# EAGLE board CC_SegmentoE,B (EAGLE 9.7.0)

Size 418.47 x 126.43 mm. Coordinates in mm from the lower left corner, seen from the top.
Outline: 0,0 418.47,0 418.47,126.43 0,126.43 0,0
Copper layers (1*16): Top 0.035mm / dielectric 1.5mm / Bottom 0.035mm
Design rules "default": minimum track width 6mil, minimum drill 0.35mm, track to track 6mil, track to pad 6mil, pad to pad 6mil, via to via 6mil, smd to smd 6mil, copper to edge 40mil, drill to drill 6mil, minimum pad ring 10mil, minimum via ring 8mil, stop-mask expansion 4mil, vias tented up to drill 0mil, thermal gap 10mil

## Footprints (pad centres in the part's own frame; a part is rotated, then mirrored left to right if it is on the bottom)
BATTERY-GENERIC = drill 1.118 pad 3.15 octagon: + 2.54,0; - -2.54,0
LEDRD254W60D565H860B = drill 0.981 pad 1.581: 1 -1.27,0; 2 1.27,0
RESAD1016W63L850D250B = drill 0.83 pad 1.43: 1 -5.08,0; 2 5.08,0
78B04ST = drill 0.8: 1 -3.81,-3.81; 2 -1.27,-3.81; 3 1.27,-3.81; 4 3.81,-3.81; 5 3.81,3.81; 6 1.27,3.81; 7 -1.27,3.81; 8 -3.81,3.81
TO92 = drill 0.813 octagon: 1 -1.27,0; 2 0,1.905; 3 1.27,0
DIP762W53P254L1969H508Q14B = drill 0.743 pad 1.343: 1 -3.81,7.62; 2 -3.81,5.08; 3 -3.81,2.54; 4 -3.81,0; 5 -3.81,-2.54; 6 -3.81,-5.08; 7 -3.81,-7.62; 8 3.81,-7.62; 9 3.81,-5.08; 10 3.81,-2.54; 11 3.81,0; 12 3.81,2.54; 13 3.81,5.08; 14 3.81,7.62

## Placement (x,y rotation side)
BAT3  4.5V  [BATTERY-GENERIC]  8.26,87.74 270 top
BAT8  4.5V  [BATTERY-GENERIC]  242.38,113.24 270 top
D1  RED  [LEDRD254W60D565H860B]  386.23,34.37 0 top
D2  RED  [LEDRD254W60D565H860B]  99.1,73.33 0 top
R1  1k  [RESAD1016W63L850D250B]  87.67,47.93 270 top
R2  1k  [RESAD1016W63L850D250B]  67.35,47.93 270 top
R3  1k  [RESAD1016W63L850D250B]  92.75,70.79 0 top
R4  10k  [RESAD1016W63L850D250B]  273.2,26.75 90 top
R5  10k  [RESAD1016W63L850D250B]  308.76,26.75 90 top
R6  10k  [RESAD1016W63L850D250B]  376.58,97.14 90 top
R31  10k  [RESAD1016W63L850D250B]  283.36,26.75 90 top
R32  10k  [RESAD1016W63L850D250B]  296.06,26.75 90 top
R33  10k  [RESAD1016W63L850D250B]  386.74,97.14 90 top
R34  1k  [RESAD1016W63L850D250B]  379.88,31.83 0 top
R35  10k  [RESAD1016W63L850D250B]  399.44,107.3 0 top
R36  1k  [RESAD1016W63L850D250B]  311.3,8.97 270 top
R38  1k  [RESAD1016W63L850D250B]  412.14,117.46 90 top
R40  500  [RESAD1016W63L850D250B]  367.18,24.21 90 top
R46  200  [RESAD1016W63L850D250B]  282.6,97.14 90 top
R47  1k  [RESAD1016W63L850D250B]  285.14,97.14 90 top
R48  200  [RESAD1016W63L850D250B]  297.84,97.14 90 top
R49  1k  [RESAD1016W63L850D250B]  300.38,97.14 90 top
R50  200  [RESAD1016W63L850D250B]  313.08,97.14 90 top
R51  1k  [RESAD1016W63L850D250B]  315.62,97.14 90 top
R52  1k  [RESAD1016W63L850D250B]  330.86,97.14 90 top
R53  200  [RESAD1016W63L850D250B]  328.32,97.14 90 top
R54  10k  [RESAD1016W63L850D250B]  348.64,99.68 90 top
R55  10k  [RESAD1016W63L850D250B]  353.72,99.68 90 top
R56  10k  [RESAD1016W63L850D250B]  363.88,97.14 90 top
R57  1k  [RESAD1016W63L850D250B]  366.42,81.9 90 top
SW1  SPST-478B04ST  [78B04ST]  40.68,64.44 0 top
SW6  SPST-478B04ST  [78B04ST]  268.63,98.41 0 top
T1  NPN  [TO92]  283.36,16.59 0 top
T16  NPN  [TO92]  296.06,19.13 0 top
T21  NPN  [TO92]  308.76,19.13 0 top
T23  NPN  [TO92]  285.14,104.76 0 top
T24  NPN  [TO92]  364.64,36.91 0 top
T25  NPN  [TO92]  339.24,34.37 0 top
T26  NPN  [TO92]  351.94,34.37 0 top
T27  NPN  [TO92]  300.38,107.3 0 top
T28  NPN  [TO92]  315.62,104.76 0 top
T29  NPN  [TO92]  330.86,104.76 0 top
T30  NPN  [TO92]  343.56,86.98 0 top
T31  NPN  [TO92]  353.72,86.98 0 top
T32  NPN  [TO92]  363.88,89.52 0 top
T33  NPN  [TO92]  376.58,107.3 0 top
T34  NPN  [TO92]  386.74,107.3 0 top
T35  NPN  [TO92]  404.52,109.84 0 top
T39  NPN  [TO92]  273.2,16.59 0 top
U1  74HC32_PDIP  [DIP762W53P254L1969H508Q14B]  80.05,64.44 90 top
U2  74HC04_PDIP  [DIP762W53P254L1969H508Q14B]  59.73,64.44 90 top

## Library data of the parts
BAT3 BAT8 R1-R6 R31-R36 R38 R40 R46-R57 SW1 SW6 U1 U2 = Tinkercad
D1 D2 = Tinkercad; CATEGORY: Opto-Electronic; SUB-CATEGORY: LED; VALUE: LED_RED
T1 T16 T21 T23-T35 T39 = Tinkercad; CATEGORY: Transistor; SUB-CATEGORY: BJT; TYPE: NPN

## Nets
BAT3+: BAT3.+ SW1.5 SW1.6 SW1.7 SW1.8 U1.14 U2.14
BAT3-: BAT3.- D2.2 R1.2 R2.2
BAT8+: BAT8.+ R46.1 R48.1 R50.1 R53.1 SW6.5 SW6.6 SW6.7 SW6.8 T24.1 T25.1 T26.1 T30.1 T33.1 T39.1
BAT8-: BAT8.- D1.2 R36.2 R38.2 R40.1 R57.1 T23.3 T27.3 T28.3 T29.3
D1_A: D1.1 R34.2
D2_A: D2.1 R3.2
SW6_1: R4.2 R6.1 R47.1 SW6.1
SW6_2: R49.1 SW6.2
SW6_3: R33.1 R51.1 SW6.3
SW6_4: R5.2 R52.1 SW6.4
T1_B: R31.1 T1.2
T1_C: T1.1 T39.3
T1_E: T1.3 T16.1
T16_B: R32.1 T16.2
T16_E: T16.3 T21.1
T21_B: R5.1 T21.2
T21_E: R36.1 T21.3 T24.2
T23_B: R47.2 T23.2
T23_C: R46.2 R54.2 T23.1
T24_E: R34.1 R40.2 T24.3 T25.3 T26.3
T27_B: R49.2 T27.2
T27_C: R31.2 R48.2 T27.1
T28_B: R51.2 T28.2
T28_C: R32.2 R50.2 R55.2 T28.1
T29_B: R52.2 T29.2
T29_C: R35.1 R53.2 R56.2 T29.1
T30_B: R54.1 T30.2
T31_B: R55.1 T31.2
T31_C: T30.3 T31.1
T32_B: R56.1 T32.2
T32_C: T31.3 T32.1
T32_E: R57.2 T25.2 T32.3
T33_B: R6.2 T33.2
T33_E: T33.3 T34.1
T34_B: R33.2 T34.2
T35_B: R35.2 T35.2
T35_C: T34.3 T35.1
T35_E: R38.1 T26.2 T35.3
T39_B: R4.1 T39.2
U1_1Y: U1.3 U1.9
U1_3Y: R3.1 U1.8
U1_4Y: U1.10 U1.11
U1_GND: R1.1 U1.7
U2_1A: SW1.1 U2.1
U2_1Y: U1.1 U2.2
U2_2A: SW1.2 U2.3
U2_2Y: U1.2 U2.4
U2_5A: SW1.3 U2.11
U2_5Y: U1.12 U2.10
U2_6A: SW1.4 U2.13
U2_6Y: U1.13 U2.12
U2_GND: R2.1 U2.7

## Tracks (layer width: path | path; a pad name or v marks a point on that pad's centre or on a via)
BAT3+  (6 unrouted)
BAT3-  (3 unrouted)
BAT8+  (14 unrouted)
BAT8-  (9 unrouted)
D1_A  (1 unrouted)
D2_A  (1 unrouted)
SW6_1  (3 unrouted)
SW6_2  (1 unrouted)
SW6_3  (2 unrouted)
SW6_4  (2 unrouted)
T1_B  (1 unrouted)
T1_C  (1 unrouted)
T1_E  (1 unrouted)
T16_B  (1 unrouted)
T16_E  (1 unrouted)
T21_B  (1 unrouted)
T21_E  (2 unrouted)
T23_B  (1 unrouted)
T23_C  (2 unrouted)
T24_E  (4 unrouted)
T27_B  (1 unrouted)
T27_C  (2 unrouted)
T28_B  (1 unrouted)
T28_C  (3 unrouted)
T29_B  (1 unrouted)
T29_C  (3 unrouted)
T30_B  (1 unrouted)
T31_B  (1 unrouted)
T31_C  (1 unrouted)
T32_B  (1 unrouted)
T32_C  (1 unrouted)
T32_E  (2 unrouted)
T33_B  (1 unrouted)
T33_E  (1 unrouted)
T34_B  (1 unrouted)
T35_B  (1 unrouted)
T35_C  (1 unrouted)
T35_E  (2 unrouted)
T39_B  (1 unrouted)
U1_1Y  (1 unrouted)
U1_3Y  (1 unrouted)
U1_4Y  (1 unrouted)
U1_GND  (1 unrouted)
U2_1A  (1 unrouted)
U2_1Y  (1 unrouted)
U2_2A  (1 unrouted)
U2_2Y  (1 unrouted)
U2_5A  (1 unrouted)
U2_5Y  (1 unrouted)
U2_6A  (1 unrouted)
U2_6Y  (1 unrouted)
U2_GND  (1 unrouted)